# EAGLE board PWM_ATUC64L4U (EAGLE 5.11)
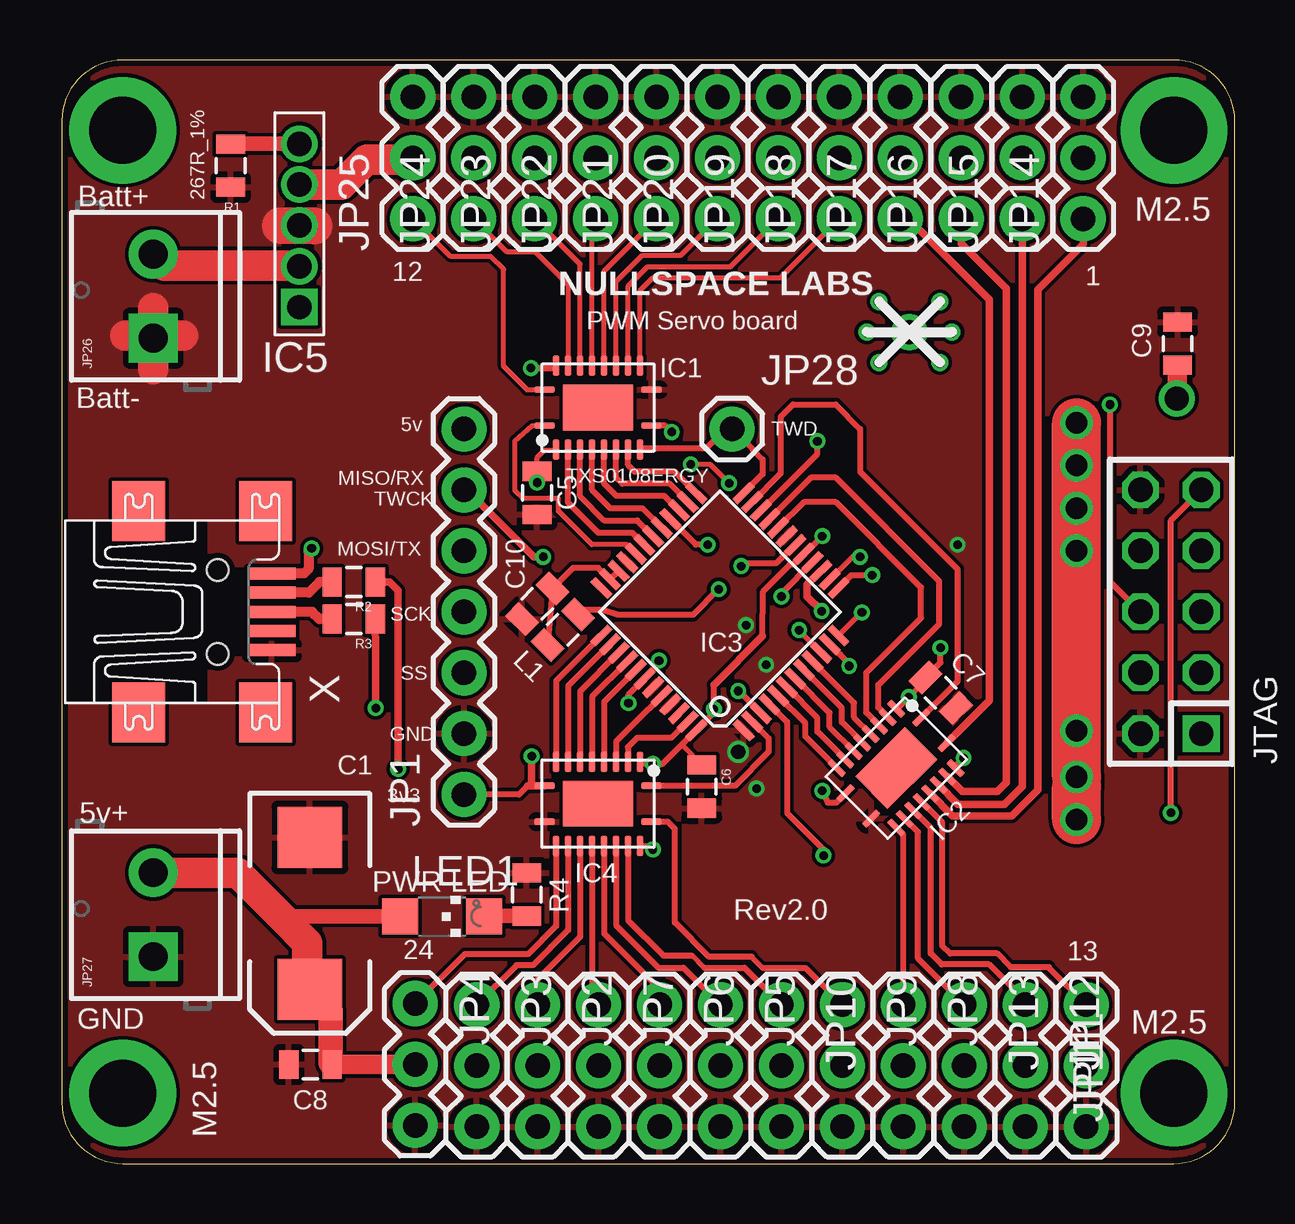
[diagram p0: board, top side]
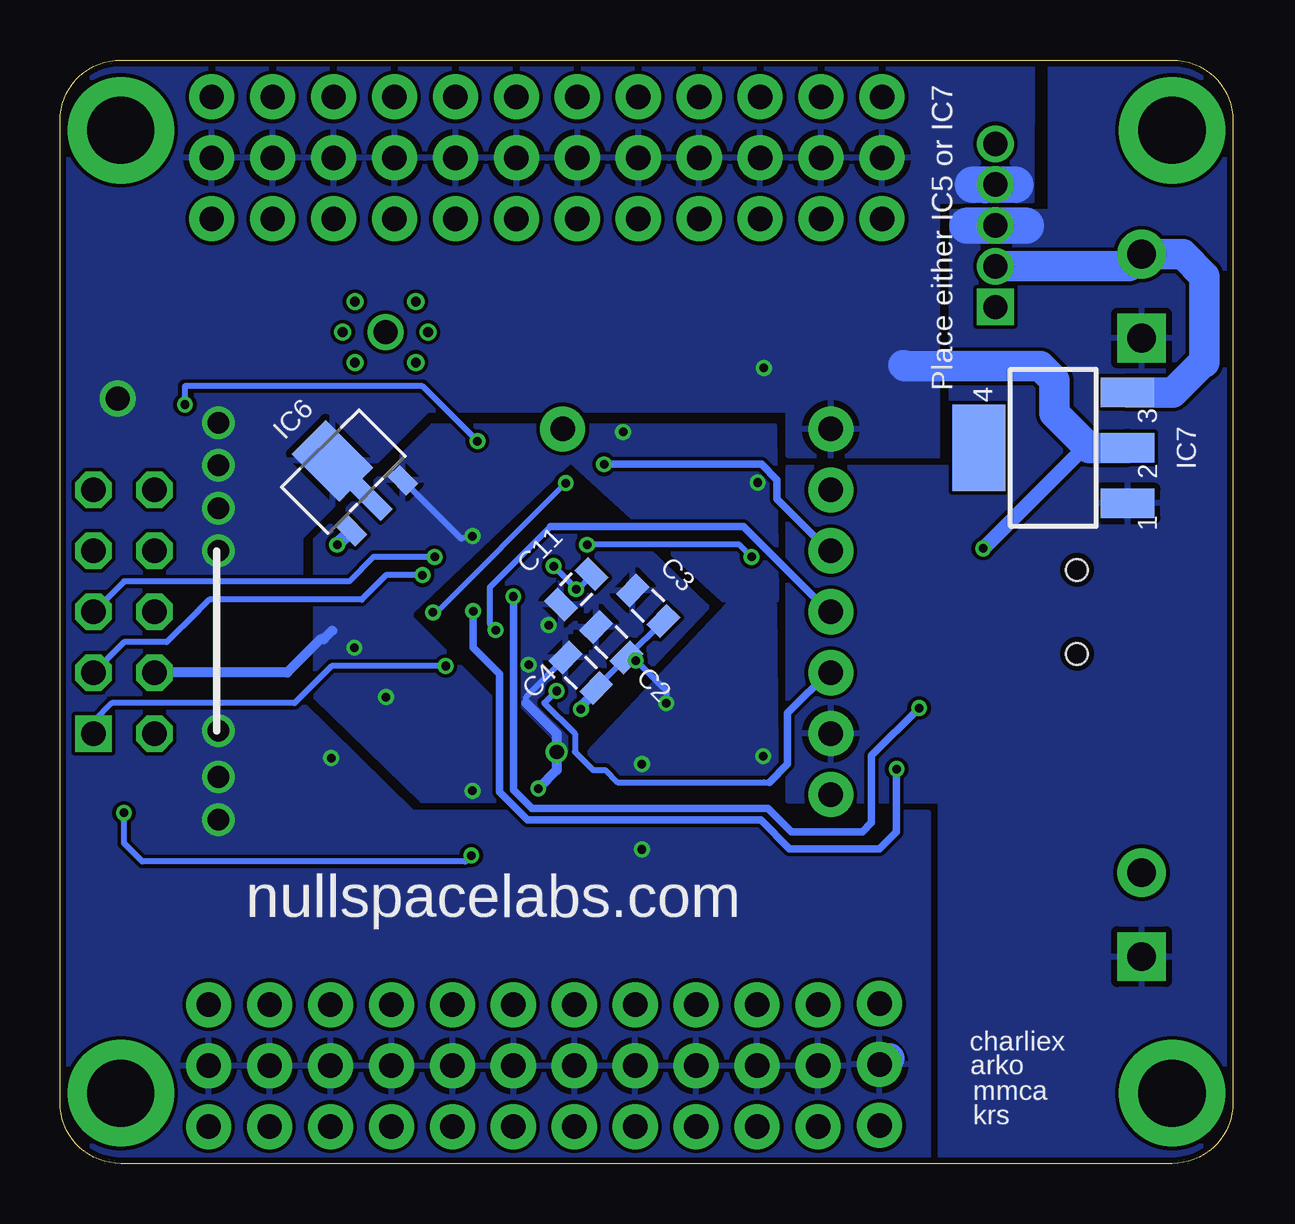
[diagram p1: board, bottom side, seen from below]

Size 48.89 x 46 mm. Coordinates in mm from the lower left corner, seen from the top.
Outline: 48.89,43.46 arc90 46.36,46 2.54,46 arc90 0,43.46 0,2.54 arc90 2.54,0 46.36,0 arc90 48.89,2.54 48.89,43.46
Copper layers (1*16): Top 0.035mm / dielectric 1.5mm / Bottom 0.035mm
Design rules "ITead_rule *": minimum track width 6mil, minimum drill 12mil, track to track 6mil, track to pad 6mil, pad to pad 6mil, via to via 6mil, smd to smd 0mil, copper to edge 10mil, drill to drill 10mil, minimum pad ring 10mil, minimum via ring 6mil, stop-mask expansion 2mil, vias tented up to drill 15mil, thermal gap 10mil

## Footprints (pad centres in the part's own frame; a part is rotated, then mirrored left to right if it is on the bottom)
EIA7343 = smd 2.55 x 2.7: A 3.17,0; C -3.17,0
0805 = smd 0.8 x 1.2: 1 -0.9,0; 2 0.9,0
RGY = smd 0.85 x 0.28: 1 -2.225,-0.75; 10 2.225,-0.75; 11 2.225,0.75; 20 -2.225,0.75 | smd 0.28 x 0.85: 2 -1.75,-1.75; 3 -1.25,-1.75; 4 -0.75,-1.75; 5 -0.25,-1.75; 6 0.25,-1.75; 7 0.75,-1.75; 8 1.25,-1.75; 9 1.75,-1.75; 12 1.75,1.75; 13 1.25,1.75; 14 0.75,1.75; 15 0.25,1.75; 16 -0.25,1.75; 17 -0.75,1.75; 18 -1.25,1.75; 19 -1.75,1.75 | smd 2.921 x 1.905: E@1 0,0
TQFP48 = smd 1.016 x 0.305: 1 -4.191,2.794; 2 -4.191,2.286; 3 -4.191,1.778; 4 -4.191,1.27; 5 -4.191,0.762; 6 -4.191,0.254; 7 -4.191,-0.254; 8 -4.191,-0.762; 9 -4.191,-1.27; 10 -4.191,-1.778; 11 -4.191,-2.286; 12 -4.191,-2.794; 25 4.191,-2.794; 26 4.191,-2.286; 27 4.191,-1.778; 28 4.191,-1.27; 29 4.191,-0.762; 30 4.191,-0.254; 31 4.191,0.254; 32 4.191,0.762; 33 4.191,1.27; 34 4.191,1.778; 35 4.191,2.286; 36 4.191,2.794 | smd 0.305 x 1.016: 13 -2.794,-4.191; 14 -2.286,-4.191; 15 -1.778,-4.191; 16 -1.27,-4.191; 17 -0.762,-4.191; 18 -0.254,-4.191; 19 0.254,-4.191; 20 0.762,-4.191; 21 1.27,-4.191; 22 1.778,-4.191; 23 2.286,-4.191; 24 2.794,-4.191; 37 2.794,4.191; 38 2.286,4.191; 39 1.778,4.191; 40 1.27,4.191; 41 0.762,4.191; 42 0.254,4.191; 43 -0.254,4.191; 44 -0.762,4.191; 45 -1.27,4.191; 46 -1.778,4.191; 47 -2.286,4.191; 48 -2.794,4.191
SLTS284E = drill 1.016 pad 1.27 square: 1 -3.404,0 | drill 1.016 pad 1.27 round: 2 -1.702,0; 3 0,0; 4 1.702,0 | drill 1.016 round: 5 3.404,0
SOT89-3L = smd 0.7 x 1.1: 1 -1.5,-1.75; 3 1.5,-1.75 | smd 0.7 x 1.8: 2 0,-1.4 | smd 2 x 2.8: 4 0,0.9
V-REG-3_SOT223 = smd 1.219 x 2.235: 1 -2.311,-3.099; 2 0,-3.099; 3 2.311,-3.099 | smd 3.6 x 2.2: 4 0,3.099
1X07 = drill 1.016 pad 1.88 round: 1 0,0; 2 2.54,0; 3 5.08,0; 4 7.62,0; 5 10.16,0; 6 12.7,0; 7 15.24,0
1X03 = drill 1.016 pad 1.88 round: 1 0,0; 2 2.54,0; 3 5.08,0
SCREWTERMINAL-3.5MM-2 = drill 1.2 pad 2.032 square: 1 0,0 | drill 1.2 pad 2.032 round: 2 3.5,0
1X01 = drill 1.016 pad 1.88 round: 1 0,0
AVR-JTAG-10 = drill 1.016 square: 1 -5.08,-1.27 | drill 1.016 octagon: 2 -5.08,1.27; 3 -2.54,-1.27; 4 -2.54,1.27; 5 0,-1.27; 6 0,1.27; 7 2.54,-1.27; 8 2.54,1.27; 9 5.08,-1.27; 10 5.08,1.27
CHIPLED_1206 = smd 1.5 x 1.5: A 0,-1.75; C 0,1.75
UX60-MB-5ST = smd 2 x 0.5: 1 2.25,1.6; 2 2.25,0.8; 3 2.25,0; 4 2.25,-0.8; 5 2.25,-1.6 | smd 2.2 x 2.5: M1 -3.3,-4.2; M2 -3.3,4.2; M3 2,4.2; M4 2,-4.2 | hole 0.9: 0,-1.75; 0,1.75

## Placement (x,y rotation side)
C1  100uf  [EIA7343]  10.34,10.43 270 top
C2  .1uf  [0805]  25.91,21.73 135 bottom
C3  .1uf  [0805]  24.38,23.25 135 bottom
C4  .1uf  [0805]  27.18,20.46 135 bottom
C5  .1uf  [0805]  19.81,27.95 270 top
C6  .1uf  [0805]  26.67,15.71 270 top
C7  .1uf  [0805]  36.63,19.62 315 top
C8  10uf  [0805]  10.36,4.13 180 top
C9  .1uf  [0805]  46.51,34.18 90 top
C10  .1uf  [0805]  19.82,23.33 225 top
C11  2.2uf  [0805]  27.37,23.93 225 bottom
IC1  TXS0108ERGY  [RGY]  22.35,31.51 0 top
IC2  TXS0108ERGY  [RGY]  34.78,16.49 225 top
IC3  ATUC64L4U  [TQFP48]  27.43,23 135 top
IC4  TXS0108ERGY  [RGY]  22.35,15 180 top
IC5  PTR08100W  [SLTS284E]  9.91,39.1 90 top
IC6  AP1115  [SOT89-3L]  36.9,28.66 45 bottom
IC7  [V-REG-3_SOT223]  7.49,29.83 90 bottom
JP1  [1X07]  16.76,15.38 90 top
JP2  [1X03]  19.84,6.62 270 top
JP3  [1X03]  17.3,6.62 270 top
JP4  [1X03]  14.73,6.67 270 top
JP5  [1X03]  27.46,6.62 270 top
JP6  [1X03]  24.92,6.62 270 top
JP7  [1X03]  22.38,6.62 270 top
JP8  [1X03]  35.08,6.62 270 top
JP9  [1X03]  32.54,6.62 270 top
JP10  [1X03]  30,6.62 270 top
JP11  [1X03]  42.7,6.62 270 top
JP12  [1X03]  40.16,6.62 270 top
JP13  [1X03]  37.62,6.62 270 top
JP14  [1X03]  42.57,39.38 90 top
JP15  [1X03]  40.03,39.38 90 top
JP16  [1X03]  37.49,39.38 90 top
JP17  [1X03]  34.95,39.38 90 top
JP18  [1X03]  32.41,39.38 90 top
JP19  [1X03]  29.87,39.38 90 top
JP20  [1X03]  27.33,39.38 90 top
JP21  [1X03]  24.79,39.38 90 top
JP22  [1X03]  22.25,39.38 90 top
JP23  [1X03]  19.71,39.38 90 top
JP24  [1X03]  17.17,39.38 90 top
JP25  [1X03]  14.63,39.38 90 top
JP26  [SCREWTERMINAL-3.5MM-2]  3.81,34.4 90 top
JP27  [SCREWTERMINAL-3.5MM-2]  3.81,8.62 90 top
JP28  M01PTH  [1X01]  27.94,30.62 0 top
JTAG  AVR-JTAG-10  [AVR-JTAG-10]  46.23,23 90 top
L1  [0805]  20.88,22.25 45 top
LED1  [CHIPLED_1206]  15.85,10.3 270 top
R1  267R_1%  [0805]  7.04,41.59 270 top
R2  36R  [0805]  12.17,24.24 180 top
R3  36R  [0805]  12.17,22.7 180 top
R4  267R_1%  [0805]  19.38,11.21 270 top
X  MINI-USB-UX60-MB-5ST  [UX60-MB-5ST]  6.5,23 0 top

## Library data of the parts
C1-C11 JP1 JP26-JP28 L1 R1-R4 = SparkFun
IC1 IC2 IC4 = PWM_ATUC64L4U
IC3 JTAG = atmel-avr32-michel
IC5 IC6 = PWM
IC7 = avrcanbus
JP2-JP25 = Speaker_shield
LED1 = led
X = con-hirose; OC_FARNELL: unknown; OC_NEWARK: unknown

## Nets
3V3: C2.1 C3.1 C4.1 C5.1 C6.1 C7.1 IC1.2 IC1.10 IC2.2 IC2.10 IC3.17 IC3.42 IC3.48 IC4.2 IC4.10 IC6.3 JP1.1 JTAG.4
A09: IC4.20 JP9.1
A11: IC1.15 JP21.1
A12: IC4.18 JP10.1
A13: IC1.14 JP20.1
A15: IC4.12 JP4.1
A16: IC4.13 JP3.1
A17: IC4.14 JP2.1
A18: IC4.16 JP6.1
A19: IC4.15 JP7.1
A20: IC1.13 JP19.1
A21: IC1.12 JP18.1
A22: IC2.16 JP14.1
B00: IC2.13 JP13.1
B02: IC2.14 JP12.1
B03: IC2.15 JP11.1
B04: IC2.18 JP16.1
B05: IC2.17 JP15.1
B06: IC1.17 JP23.1
B07: IC1.18 JP24.1
B08: IC1.20 JP25.1
B09: IC1.16 JP22.1
B10: IC2.20 JP17.1
B11: IC4.17 JP5.1
B12: IC2.12 JP8.1
BATT_IN: IC5.2 IC7.3 JP26.2
GND: C1.C C2.2 C3.2 C4.2 C5.2 C6.2 C7.2 C8.2 C9.2 C10.2 C11.2 IC1.11 IC2.11 IC3.1 IC3.19 IC3.33 IC3.43 IC3.45 IC4.11 IC5.3 IC6.1 IC7.1 JP1.2 JP2.3 JP3.3 JP4.3 JP5.3 JP6.3 JP7.3 JP8.3 JP9.3 JP10.3 JP11.3 JP12.3 JP13.3 JP14.3 JP15.3 JP16.3 JP17.3 JP18.3 JP19.3 JP20.3 JP21.3 JP22.3 JP23.3 JP24.3 JP25.3 JP26.1 JP27.1 JTAG.2 JTAG.10 R1.2 R4.1 X.5
MISO/RX: IC3.28 JP1.6
MOSI/TX: IC3.12 JP1.5
N$5: IC5.5 R1.1
N$7: R2.2 X.2
N$8: R3.2 X.3
N$9: IC5.1
N$10: LED1.C R4.2
N$11: X.4
PA09: IC3.2 IC4.1
PA11: IC1.6 IC3.27
PA12: IC3.47 IC4.3
PA13: IC1.7 IC3.26
PA14: IC3.36
PA15: IC3.37 IC4.9
PA16: IC3.38 IC4.8
PA17: IC3.39 IC4.7
PA18: IC3.41 IC4.5
PA19: IC3.40 IC4.6
PA20: IC1.8 IC3.25
PA21: IC1.9 IC3.24 JP28.1
PA22: IC2.5 IC3.9
PB00: IC2.8 IC3.6
PB02: IC2.7 IC3.7
PB03: IC2.6 IC3.8
PB04: IC2.3 IC3.21
PB05: IC2.4 IC3.20
PB06: IC1.4 IC3.30
PB07: IC1.3 IC3.31
PB08: IC1.1 IC3.32
PB09: IC1.5 IC3.29
PB10: IC2.1 IC3.23
PB11: IC3.44 IC4.4
PB12: IC2.9 IC3.5
RESETN: IC3.22 JTAG.6
SCK: IC3.10 JP1.4
SPI_SS: IC3.3 JP1.3
TCK: IC3.11 JTAG.1
TDI: IC3.4 JTAG.9
TDO: IC3.13 JTAG.3
TMS: IC3.14 JTAG.5
TWD: IC3.46
USBC-DM: IC3.15 R2.1
USBC-DP: IC3.16 R3.1
VDDCORE: C11.1 IC3.18 L1.2
VREF: C10.1 IC3.34 IC3.35 L1.1
VREG: C1.A C8.1 C9.1 IC1.19 IC2.19 IC4.19 IC5.4 IC6.2 IC6.4 IC7.2 JP1.7 JP2.2 JP3.2 JP4.2 JP5.2 JP6.2 JP7.2 JP8.2 JP9.2 JP10.2 JP11.2 JP12.2 JP13.2 JP14.2 JP15.2 JP16.2 JP17.2 JP18.2 JP19.2 JP20.2 JP21.2 JP22.2 JP23.2 JP24.2 JP25.2 JP27.2 LED1.A X.1

## Tracks (layer width: path | path; a pad name or v marks a point on that pad's centre or on a via)
3V3  (via drill 0.36)
  Top 0.203: IC1.2 20.6,29.73 20.12,29.73 19.81,29.43 C5.1 | C6.1 25.86,17.42 25.8,17.42 | v35.31,19.44 36.04,20.18 C7.1
  Top 0.254: IC2.2 34.82,18.96 v35.31,19.44 | IC4.2 24.2,16.65 v24.64,16.65 25.03,16.65 25.8,17.42 IC3.48 27.18,18.8 v27.18,18.94 27.18,19.95 | v23.62,19.19 23.62,19.55 IC3.42 24.89,20.82 v24.89,20.97 | IC1.10 25.16,30.76 v25.43,30.49 | IC2.10 32.28,15.05 31.93,15.05 v31.7,15.53 | C7.1 36.63,20.88 v36.63,21.5 | 29.21,21.98 29.23,23.84 30.38,24.98 30.43,24.98 30.49,24.98 IC3.17 30.97,25.43 v31.7,26.15 | 19.41,15.74 19.05,15.38 JP1.1
  Top 0.305: IC4.10 20.11,15.74 19.41,15.74 19.58,15.74 v19.58,16.98 | 27.18,19.95 29.21,21.98 | C5.1 v19.81,28.38
  Bottom 0.254: 23.62,19.55 v23.62,19.19 23.62,19.7 v24.89,20.97 25.27,21.35 C2.1 | C4.1 26.8,19.32 v27.18,18.94 27.18,19.19 C2.1 | IC6.3 32.17,26.05 v31.7,26.15 | C3.1 C2.1
  Bottom 0.406: JTAG.4 39.42,20.46 38.02,21.86 37.9,21.86 37.54,22.21
  pour Bottom: 21.23,23.51 27.61,29.32 34.29,23 34.29,22.75 27.69,16.14 27.61,16.32 21.03,23.3 19.13,23.28 19.05,15.13 33.78,15.13 38.23,19.44 38.23,26 33.35,30.75 19.13,30.75 19.05,23.51
A09
  Top 0.203: 29.23,8.14 28.75,8.62
  Top 0.254: IC4.20 25.26,14.25 25.55,13.96 25.55,10.05 26.98,8.62 28.75,8.62 | 29.23,8.14 31.01,8.14 JP9.1
A11
  Top 0.203: IC1.15 22.6,37.2 JP21.1
A12
  Top 0.203: 26.26,8.67 26.77,8.17
  Top 0.254: IC4.18 23.6,10.14 25.07,8.67 26.26,8.67 | 26.77,8.17 28.45,8.17 JP10.1
A13
  Top 0.203: IC1.14 23.1,36.76 24.21,37.86 25.81,37.86 JP20.1
A15
  Top 0.254: IC4.12 20.6,9.9 19.43,8.72 16.79,8.72 JP4.1
A16
  Top 0.254: IC4.13 21.1,9.74 19.63,8.27 18.95,8.27 JP3.1
A17
  Top 0.203: 19.81,6.64 JP2.1
  Top 0.254: IC4.14 21.6,9.45 19.81,7.66 19.81,6.64
A18
  Top 0.203: 24.87,7.33 24.87,6.67 JP6.1
  Top 0.254: IC4.16 22.6,9.59 24.87,7.33
A19
  Top 0.254: IC4.15 22.1,6.89 JP7.1
A20
  Top 0.203: IC1.13 23.6,36.57 24.41,37.38 27.86,37.38 JP19.1
A21
  Top 0.203: IC1.12 24.1,36.38 24.64,36.92 29.95,36.92 JP18.1
A22
  Top 0.305: IC2.16 37.13,14.49 39.6,14.49 40.69,15.58 40.69,36.44 42.57,38.32 JP14.1
B00
  Top 0.254: IC2.13 35.69,13.81 35.69,8.55 JP13.1
B02
  Top 0.203: JP12.1 40.16,6.8
  Top 0.254: IC2.14 36.22,13.99 36.22,8.75 36.68,8.29 38.66,8.29 40.16,6.8
B03
  Top 0.254: IC2.15 36.7,14.21 36.7,9.08 37.03,8.75 38.99,8.75 39.55,8.19 41.15,8.19 41.15,8.17 JP11.1
B04
  Top 0.305: IC2.18 37.53,15.51 38.99,15.51 39.37,15.89 39.37,36.46 37.49,38.34 JP16.1
B05
  Top 0.305: IC2.17 37.35,14.97 39.29,14.97 40.03,15.71 JP15.1
B06
  Top 0.203: IC1.17 21.6,37.49 JP23.1
B07
  Top 0.203: IC1.18 21.1,36.64 19.74,38.01 18.54,38.01 JP24.1
B08
  Top 0.203: IC1.20 19.39,32.26 18.41,33.24 18.41,37.27 17.88,37.81 16.2,37.81 JP25.1
B09
  Top 0.203: IC1.16 22.1,39.23 JP22.1
B10
  Top 0.305: IC2.20 38.66,19.3 38.66,36.01 35.28,39.38 JP17.1
B11
  Top 0.254: IC4.17 23.1,9.93 24.87,8.17 25.91,8.17 JP5.1
B12
  Top 0.203: 35.05,6.64 JP8.1
  Top 0.254: IC2.12 35.05,13.74 35.05,6.64
BATT_IN
  Top 1.27: 3.79,37.91 4.27,37.43 9.91,37.43 IC5.2
  Bottom 1.27: IC7.3 2.52,32.14 1.27,33.39 1.19,33.39 1.19,36.99 2.1,37.91 JP26.2 4.34,37.4 IC5.2
GND  (via drill 0.36, 0.6)
  Top 1.27: 2.64,34.51 5.05,34.51 3.86,34.51 3.81,34.45 3.81,35.65 3.81,33.11
  Top 1.524: 9.09,39.1 IC5.3 10.52,39.1 10.52,39.08
  Bottom 0.254: IC6.1 36.77,26.36 | C4.2 29.46,19.45 29.46,19.19
  Bottom 0.406: 29.46,19.19 28.19,17.92 v28.19,17.16 28.19,16.4 v28.96,15.63
  Bottom 0.559: 36.77,26.36 v37.34,25.79
  Bottom 1.524: 8.64,39.1 11.07,39.1
  other vias: 28.52,22.44 29.36,20.79
  pour Top: 48.97,-0.88 -0.81,-0.62 -0.72,46.46 47.61,46.22 arc-89 48.87,44.96
  pour Bottom: 7.62,46.72 7.62,39.66 11.71,39.66 11.76,28.99 18.54,29.02 18.54,15.13 12.19,15.13 12.19,-0.65 -0.36,-0.47 -0.51,46.52
  pour Bottom: 21.92,23.2 27.61,28.69 33.02,23.25 33.27,22.75 27.69,17.16
MISO/RX  (via drill 0.36)
  Top 0.254: IC3.28 26.43,25.79 v26.92,25.79
  Top 0.305: v20.07,25.29 19.68,25.29 16.79,28.18 JP1.6
  Bottom 0.254: v20.07,25.29 20.57,25.79 v26.92,25.79
MOSI/TX  (via drill 0.36)
  Top 0.203: v27.81,28.36 27.03,29.15 v26.21,29.15 | IC3.12 33.33,22.98 v33.35,22.98
  Bottom 0.203: v27.81,28.36 33.2,22.98 v33.35,22.98
  Bottom 0.305: v26.21,29.15 20.45,29.15 19.66,29.15 19,28.49 19,27.7 16.94,25.64 JP1.5
N$1  (via drill 2.79 pad 4.45)
  other vias: 46.36,43.07
N$2  (via drill 2.79 pad 4.45)
  other vias: 46.36,2.93
N$3  (via drill 2.79 pad 4.45)
  other vias: 2.54,2.93
N$4  (via drill 2.79 pad 4.45)
  other vias: 2.54,43.07
N$5
  Top 0.61: IC5.5 7.11,42.51 R1.1
N$6  (via drill 0.41, 1)
  Top 0.406: v33.55,34.66 v35.33,34.66 | v35.33,34.66 v34.06,35.93 | v35.33,34.66 v34.06,33.39 | v35.33,34.66 v36.6,33.39 | v35.33,34.66 v36.6,35.93 | v35.33,34.66 v37.11,34.66
N$7
  Top 0.406: X.2 10.3,23.8 10.74,24.25 R2.2
N$8
  Top 0.406: X.3 10.44,23 10.74,22.7 R3.2
N$10
  Top 0.61: R4.2 17.61,10.31 arc90 LED1.C
PA09
  Top 0.254: IC4.1 28.05,15.75 29.46,17.16 29.46,17.73 IC3.2
PA11
  Top 0.254: IC3.27 25.12,27.83 23.11,27.83 22.6,28.34 IC1.6
PA12
  Top 0.254: IC3.47 25.41,17.74 25.35,17.74 23.98,17.74 23.6,17.36 IC4.3
PA13
  Top 0.254: IC3.26 25.33,28.33 23.37,28.33 23.1,28.6 IC1.7
PA15
  Top 0.254: IC3.37 20.6,20.12 IC4.9
PA16
  Top 0.254: IC3.38 21.1,19.9 IC4.8
PA17
  Top 0.254: IC3.39 21.6,19.68 IC4.7
PA18
  Top 0.254: IC3.41 22.6,19.25 IC4.5
PA19
  Top 0.254: IC3.40 22.1,19.47 IC4.6
PA20
  Top 0.254: IC1.8 23.6,29.12 23.88,28.84 25.54,28.84 IC3.25
PA21
  Top 0.254: IC3.24 29.21,28.73 29.21,29.35 28.8,29.76 JP28.1 27.66,30.62 26.87,29.83 24.18,29.83 IC1.9
PA22
  Top 0.254: IC3.9 33.02,19.21 33.02,18.6 IC2.5
PB00
  Top 0.254: IC3.6 31.5,18.58 31.5,18 IC2.8
PB02
  Top 0.254: IC3.7 32,18.79 32,18.2 IC2.7
PB03
  Top 0.254: IC3.8 32.51,19 32.51,18.4 IC2.6
PB04
  Top 0.254: IC2.3 34.04,19 34.04,19.95 36.58,22.49 36.58,24.27 32.26,28.59 31.22,28.59 IC3.21
PB05
  Top 0.254: IC2.4 33.53,18.8 33.53,20.46 35.81,22.75 35.81,24.02 32.26,27.57 30.93,27.57 IC3.20
PB06
  Top 0.254: IC3.30 23.98,26.81 22.61,26.81 21.6,27.81 IC1.4
PB07
  Top 0.254: IC3.31 23.77,26.3 22.35,26.3 21.1,27.55 IC1.3
PB08
  Top 0.203: IC3.32 23.56,25.79 22.1,25.79 20.7,27.19 20.7,27.72 19.23,27.72 18.9,28.03 18.9,30.14 19.59,30.76 IC1.1
  Top 0.254: IC1.1 19.95,30.76
PB09
  Top 0.254: IC1.5 22.1,28.08 22.86,27.32 24.19,27.32 IC3.29
PB10
  Top 0.254: IC2.1 37.34,20.1 37.34,24.78 33.27,28.84 33.27,30.62 32.26,31.64 30.48,31.64 29.97,31.13 29.97,28.77 IC3.23
PB11
  Top 0.254: IC3.44 23.94,18.43 23.1,17.59 IC4.4 23.11,16.76
PB12
  Top 0.254: IC3.5 30.99,18.37 30.99,17.8 IC2.9
RESETN  (via drill 0.36)
  Top 0.254: IC3.22 31.5,29.58 v31.5,30.11 | v43.69,31.64 43.69,24.27 JTAG.6
  Bottom 0.254: v31.5,30.11 33.78,32.4 43.69,32.4 v43.69,31.64
SCK  (via drill 0.36)
  Top 0.203: IC3.10 30.73,22.21 v30.73,22.24
  Bottom 0.254: v30.73,22.24 30.99,22.49 30.99,24.02 28.45,26.56
  Bottom 0.305: 28.45,26.56 20.4,26.56 16.94,23.1 JP1.4
SPI_SS  (via drill 0.36)
  Top 0.254: v28.19,19.7 28.22,19.7 IC3.3
  Bottom 0.254: v28.19,19.7 28.69,19.2 28.71,19.2 27.43,17.92 27.43,17.16 26.67,16.4 26.16,16.4 25.65,15.89 19.56,15.89 19.33,15.89
  Bottom 0.305: 19.33,15.89 18.57,16.65 18.57,18.78 16.79,20.56 JP1.3
TCK  (via drill 0.36)
  Top 0.254: IC3.11 32.44,21.22 32.82,20.85 v32.82,20.74
  Bottom 0.254: JTAG.1 47.5,18.43 46.74,19.19 39.12,19.19 37.57,20.74 v32.82,20.74
TDI  (via drill 0.36)
  Top 0.254: JTAG.9 46.23,26.81 v46.23,14.62 | IC3.4 30.23,18.41 30.23,14.62 31.75,13.09 v31.75,12.84
  Bottom 0.254: v31.75,12.84 32,12.59 45.47,12.59 46.23,13.35 v46.23,14.62
TDO  (via drill 0.36)
  Top 0.254: IC3.13 32.91,24.52 v33.78,24.52
  Bottom 0.254: v33.78,24.52 35.31,24.52 36.32,23.51 42.67,23.51 43.05,23.13 43.18,23 44.45,21.73 46.23,21.73 JTAG.3
TMS  (via drill 0.36)
  Top 0.203: IC3.14 32.95,25.29 v33.27,25.29
  Bottom 0.254: v33.27,25.29 35.81,25.29 36.83,24.27 46.23,24.27 JTAG.5
USBC-DM  (via drill 0.36)
  Top 0.305: IC3.15 31.63,24.71 31.06,24.14 31.06,23.64 v31.67,23.02 | v14.02,16.45 14.02,22.59 14.02,23.89 13.66,24.25 R2.1
  Bottom 0.305: v31.67,23.02 31.67,21.5 30.58,20.41 30.58,15.48 29.41,14.31 19.68,14.31 18.49,13.12 14.73,13.12 14.02,13.83 v14.02,16.45 14.05,16.42
USBC-DP  (via drill 0.36)
  Top 0.254: v30,23.64 30,23.77 IC3.16
  Top 0.305: v13.08,18.99 13.08,21.28 R3.1
  Bottom 0.305: v30,23.64 30,15.58 29.21,14.8 19.38,14.8 18.41,13.83 15.44,13.83 15.06,14.21 15.06,17.01 v13.08,18.99
VDDCORE  (via drill 0.36)
  Top 0.254: L1.2 21.71,23.08 22.53,23.08 23.19,22.87 26.31,22.87 v27.38,23.94 | IC3.18 30.55,25.78 29.79,25.03 28.45,25.03 v28.32,24.91
  Bottom 0.254: 27.33,23.91 v28.32,24.91 | 27.33,23.91 v27.38,23.94 | 27.33,23.91 26.74,24.51 C11.1
VREF
  Top 0.254: L1.1 C10.1 21.32,24.83 22.35,24.83 22.83,24.35 IC3.35 IC3.34
VREG  (via drill 0.36, 0.9, 1)
  Top 0.254: IC4.19 24.48,13.25 v24.64,13.09 | IC2.19 arc-45 37.32,16.63 v37.59,16.9 | IC1.19 20.5,33.16 v19.56,33.16 | 42.42,15.89 42.29,15.71 arc-90 v42.29,16.12
  Top 0.406: X.1 10.11,24.6 10.29,24.78 10.29,25.52 v10.41,25.64
  Top 0.61: 11.2,4.19 C8.1 | LED1.A 9.22,10.3 arc90 9.18,10.26
  Top 0.813: C8.1 JP4.2 | v46.48,31.89 C9.1
  Top 1.016: 11.2,4.19 11.2,6.39 C1.A
  Top 1.27: C1.A 10.24,7.36 10.24,9.21 9.18,10.26 8.84,10.61 7.32,12.12 JP27.2 | IC5.4 11.66,40.8 12.7,41.85 14.6,41.85 14.63,41.87
  Top 1.676: 42.42,15.89 v42.29,16.12 42.29,15.71
  Top 2.032: v42.29,16.12 v42.29,30.87 | v42.29,14.34 42.29,15.71
  Bottom 0.254: IC6.2 IC6.4
  Bottom 0.61: v10.41,25.64 6.12,29.93 6.1,29.93
  Bottom 1.27: JP4.2 14.33,4.38 | IC7.2 5.99,29.83 6.1,29.93 6.29,30.12 6.84,30.68 7.44,31.28 7.44,32.65 8.03,33.24 13.69,33.24 13.74,33.29
  Bottom 1.524: 9.07,40.8 10.85,40.8 10.34,40.78
  other vias: 42.29,18.05 42.29,25.54 42.29,27.32 42.29,29.1
  pour Bottom: 8.36,46.5 46.16,46.23 arc-89 48.68,43.71 48.95,2.22 arc-90 46.44,-0.34 12.7,-0.65 12.7,14.62 34.19,14.62 38.86,19.19 38.86,26.12 33.58,31.43 18.54,31.43 18.54,29.53 12.32,29.5 12.32,40.14 8.38,40.14

## Text on the board
tPlace: Batt+ | M2.5 | 12 | 1 | NULLSPACE LABS | PWM Servo board | Batt- | 5v | TWD | MISO/RX | TWCK | MOSI/TX | SCK | SS | GND | 3v3 | 5v+ | PWR LED | Rev2.0 | 24 | 13 | GND | M2.5 | M2.5
bPlace: Place either IC5 or IC7 | nullspacelabs.com | charliex | arko | mmca | krs